# Altium PCB test.PcbDoc
Units mm, origin at the board's own origin, x right, y up, seen from the top; angles counter-clockwise.
Board outline 200 x 120 mm, 2 copper layers (Top Layer, Bottom Layer); 262 components, 180 nets, 2327 pads, 4 vias.
Unrouted connection lines stored in the file: 415.
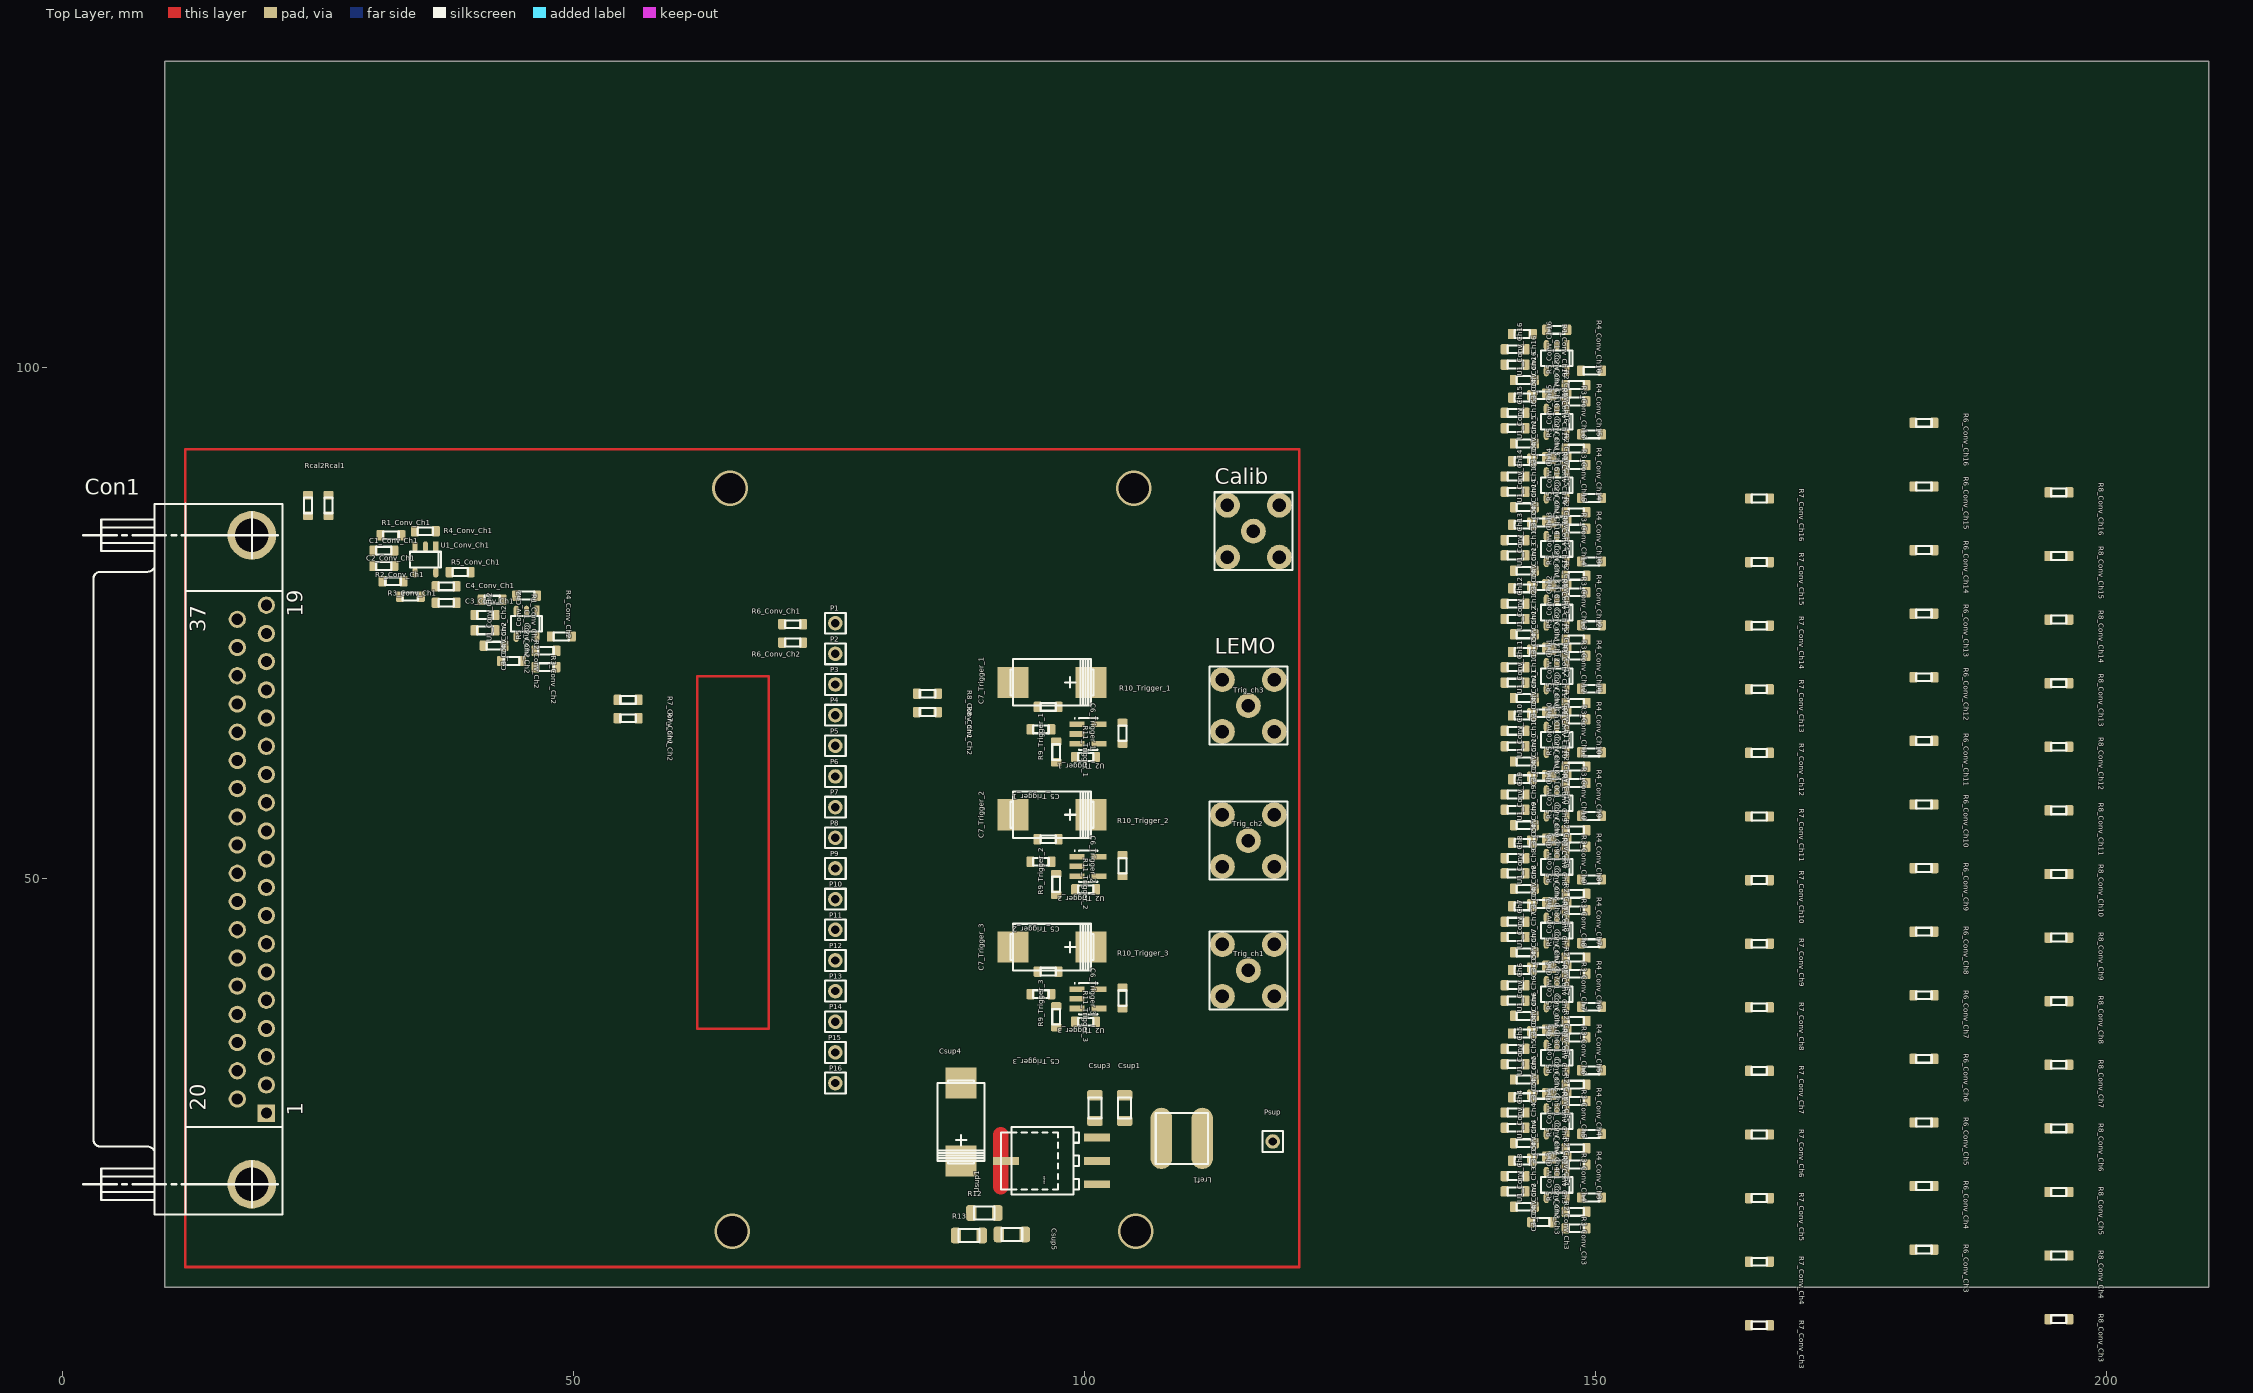
[diagram p0: Top Layer view]
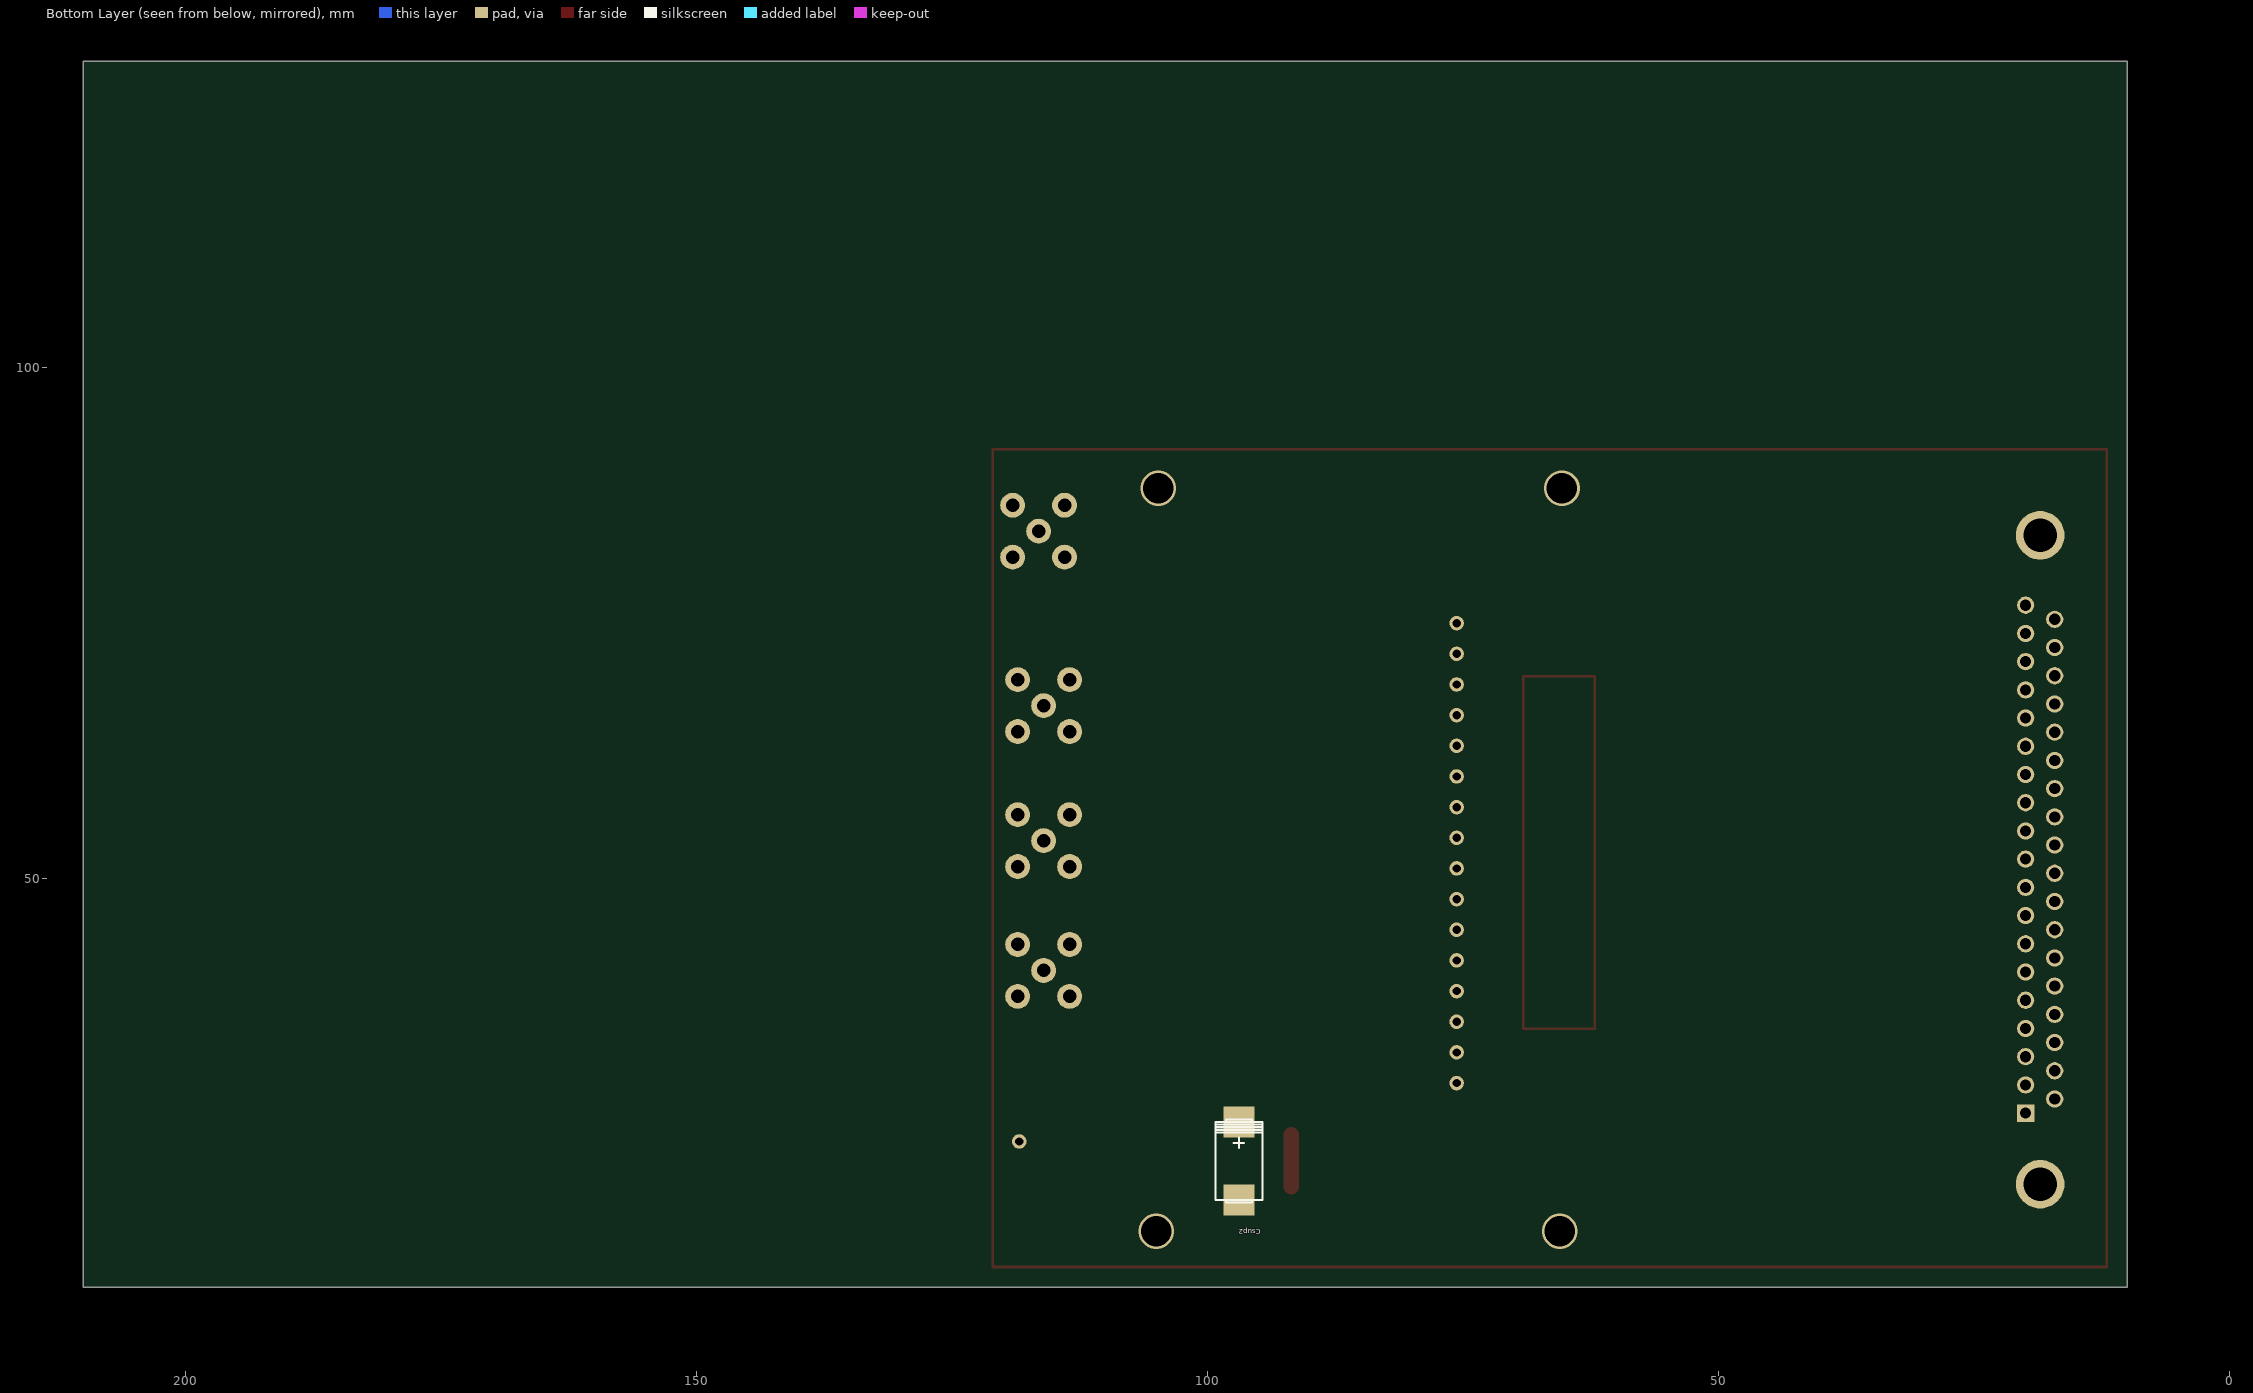
[diagram p1: Bottom Layer view, seen from below]

## Layer stack, top to bottom
Top Layer: signal copper 0.0356
Dielectric: dielectric 0.32, FR-4, Dk 4.8
Bottom Layer: signal copper 0.0356

## Board outline
10,10 10,130 210,130 210,10

## Design rules (kind name [scope] priority, off if disabled: settings)
Clearance [All] p1: gap=0.254
PolygonConnect [All] p1: connectstyle=Relief reliefconductorwidth=0.254 reliefentries=4 polygonreliefangle="90 Angle"
RoomDefinition Trigger_3 [InComponentClass('Trigger_3')] p1: confinementstyle=ConfineIn formatcopy=TRUE lockcomponents=FALSE outline 104.457,47.946 89,47.946 89,33.722 104.457,33.722
RoomDefinition Trigger_2 [InComponentClass('Trigger_2')] p2: confinementstyle=ConfineIn formatcopy=TRUE lockcomponents=FALSE outline 104.457,60.9 89,60.9 89,46.676 104.457,46.676
RoomDefinition Trigger_1 [InComponentClass('Trigger_1')] p3: confinementstyle=ConfineIn formatcopy=FALSE lockcomponents=FALSE outline 104.457,73.854 89,73.854 89,59.63 104.457,59.63
RoomDefinition Ref_Supply [InComponentClass('Ref_Supply')] p4: confinementstyle=ConfineIn formatcopy=TRUE lockcomponents=FALSE outline 84.5,12.986 119.8,12.986 119.8,33.372 84.5,33.372
RoomDefinition In-Out [InComponentClass('In-Out')] p5: confinementstyle=ConfineIn formatcopy=TRUE lockcomponents=FALSE outline 211,10 241,10 241,31 211,31
RoomDefinition Conv_Ch16 [InComponentClass('Conv_Ch16')] p6: confinementstyle=ConfineIn formatcopy=TRUE lockcomponents=FALSE outline 140.2,95.699 151.2,95.699 151.2,104.699 140.2,104.699
RoomDefinition Conv_Ch15 [InComponentClass('Conv_Ch15')] p7: confinementstyle=ConfineIn formatcopy=TRUE lockcomponents=FALSE outline 140.2,89.476 151.2,89.476 151.2,98.476 140.2,98.476
RoomDefinition Conv_Ch14 [InComponentClass('Conv_Ch14')] p8: confinementstyle=ConfineIn formatcopy=TRUE lockcomponents=FALSE outline 140.2,83.253 151.2,83.253 151.2,92.253 140.2,92.253
RoomDefinition Conv_Ch13 [InComponentClass('Conv_Ch13')] p9: confinementstyle=ConfineIn formatcopy=TRUE lockcomponents=FALSE outline 140.2,77.03 151.2,77.03 151.2,86.03 140.2,86.03
RoomDefinition Conv_Ch12 [InComponentClass('Conv_Ch12')] p10: confinementstyle=ConfineIn formatcopy=TRUE lockcomponents=FALSE outline 140.2,70.807 151.2,70.807 151.2,79.807 140.2,79.807
RoomDefinition Conv_Ch11 [InComponentClass('Conv_Ch11')] p11: confinementstyle=ConfineIn formatcopy=TRUE lockcomponents=FALSE outline 140.2,64.584 151.2,64.584 151.2,73.584 140.2,73.584
RoomDefinition Conv_Ch10 [InComponentClass('Conv_Ch10')] p12: confinementstyle=ConfineIn formatcopy=TRUE lockcomponents=FALSE outline 140.2,58.361 151.2,58.361 151.2,67.361 140.2,67.361
RoomDefinition Conv_Ch9 [InComponentClass('Conv_Ch9')] p13: confinementstyle=ConfineIn formatcopy=TRUE lockcomponents=FALSE outline 140.2,52.138 151.2,52.138 151.2,61.138 140.2,61.138
RoomDefinition Conv_Ch8 [InComponentClass('Conv_Ch8')] p14: confinementstyle=ConfineIn formatcopy=TRUE lockcomponents=FALSE outline 140.2,45.915 151.2,45.915 151.2,54.915 140.2,54.915
RoomDefinition Conv_Ch7 [InComponentClass('Conv_Ch7')] p15: confinementstyle=ConfineIn formatcopy=TRUE lockcomponents=FALSE outline 140.2,39.692 151.2,39.692 151.2,48.692 140.2,48.692
RoomDefinition Conv_Ch6 [InComponentClass('Conv_Ch6')] p16: confinementstyle=ConfineIn formatcopy=TRUE lockcomponents=FALSE outline 140.2,33.469 151.2,33.469 151.2,42.469 140.2,42.469
RoomDefinition Conv_Ch5 [InComponentClass('Conv_Ch5')] p17: confinementstyle=ConfineIn formatcopy=TRUE lockcomponents=FALSE outline 140.2,27.246 151.2,27.246 151.2,36.246 140.2,36.246
RoomDefinition Conv_Ch4 [InComponentClass('Conv_Ch4')] p18: confinementstyle=ConfineIn formatcopy=TRUE lockcomponents=FALSE outline 140.2,21.023 151.2,21.023 151.2,30.023 140.2,30.023
RoomDefinition Conv_Ch3 [InComponentClass('Conv_Ch3')] p19: confinementstyle=ConfineIn formatcopy=TRUE lockcomponents=FALSE outline 140.2,14.8 151.2,14.8 151.2,23.8 140.2,23.8
RoomDefinition Conv_Ch2 [InComponentClass('Conv_Ch2')] p20: confinementstyle=ConfineIn formatcopy=TRUE lockcomponents=FALSE outline 39.4,69.7 50.4,69.7 50.4,78.7 39.4,78.7
RoomDefinition Conv_Ch1 [InComponentClass('Conv_Ch1')] p21: confinementstyle=ConfineIn formatcopy=FALSE lockcomponents=FALSE outline 29.5,76 40.5,76 40.5,85 29.5,85
RoutingVias [All] p1: holewidth=0.711 width=1.27 viastyle="Through Hole" minholewidth=0.711 minwidth=1.27 maxholewidth=0.711 maxwidth=1.27
SilkscreenOverComponentPads [All] p1: minsilkscreentomaskgap=0.254
SolderMaskExpansion [All] p1: expansion=0.102
Width [All] p1: maxlimit=0.254 minlimit=0.254 preferedwidth=0.254
27 further rules are at their usual default settings.

## Classes and differential pairs
channel class Trigger: Trigger_1 Trigger_2 Trigger_3
channel class Converter: Conv_Ch1 Conv_Ch2 Conv_Ch3 Conv_Ch4 Conv_Ch5 Conv_Ch6 Conv_Ch7 Conv_Ch8 Conv_Ch9 Conv_Ch10 Conv_Ch11 Conv_Ch12 Conv_Ch13 Conv_Ch14 Conv_Ch15 Conv_Ch16
component class Trigger_3: C5_Trigger_3 C6_Trigger_3 C7_Trigger_3 R9_Trigger_3 R10_Trigger_3 R11_Trigger_3 U2_Trigger_3
component class Trigger_2: C5_Trigger_2 C6_Trigger_2 C7_Trigger_2 R9_Trigger_2 R10_Trigger_2 R11_Trigger_2 U2_Trigger_2
component class Trigger_1: C5_Trigger_1 C6_Trigger_1 C7_Trigger_1 R9_Trigger_1 R10_Trigger_1 R11_Trigger_1 U2_Trigger_1
component class Ref_Supply: Csup1 Csup2 Csup3 Csup4 Csup5 Lref1 Psup R12 R13 Usup1
component class In-Out: Calib Con1 Con3 P1 P2 P3 P4 P5 P6 P7 P8 P9 P10 P11 P12 P13 P14 P15 P16 Rcal1 Rcal2 Trig_ch1 Trig_ch2 Trig_ch3
component class Conv_Ch16: C1_Conv_Ch16 C2_Conv_Ch16 C3_Conv_Ch16 C4_Conv_Ch16 R1_Conv_Ch16 R2_Conv_Ch16 R3_Conv_Ch16 R4_Conv_Ch16 R5_Conv_Ch16 R6_Conv_Ch16 R7_Conv_Ch16 R8_Conv_Ch16 U1_Conv_Ch16
component class Conv_Ch15: C1_Conv_Ch15 C2_Conv_Ch15 C3_Conv_Ch15 C4_Conv_Ch15 R1_Conv_Ch15 R2_Conv_Ch15 R3_Conv_Ch15 R4_Conv_Ch15 R5_Conv_Ch15 R6_Conv_Ch15 R7_Conv_Ch15 R8_Conv_Ch15 U1_Conv_Ch15
component class Conv_Ch14: C1_Conv_Ch14 C2_Conv_Ch14 C3_Conv_Ch14 C4_Conv_Ch14 R1_Conv_Ch14 R2_Conv_Ch14 R3_Conv_Ch14 R4_Conv_Ch14 R5_Conv_Ch14 R6_Conv_Ch14 R7_Conv_Ch14 R8_Conv_Ch14 U1_Conv_Ch14
component class Conv_Ch13: C1_Conv_Ch13 C2_Conv_Ch13 C3_Conv_Ch13 C4_Conv_Ch13 R1_Conv_Ch13 R2_Conv_Ch13 R3_Conv_Ch13 R4_Conv_Ch13 R5_Conv_Ch13 R6_Conv_Ch13 R7_Conv_Ch13 R8_Conv_Ch13 U1_Conv_Ch13
component class Conv_Ch12: C1_Conv_Ch12 C2_Conv_Ch12 C3_Conv_Ch12 C4_Conv_Ch12 R1_Conv_Ch12 R2_Conv_Ch12 R3_Conv_Ch12 R4_Conv_Ch12 R5_Conv_Ch12 R6_Conv_Ch12 R7_Conv_Ch12 R8_Conv_Ch12 U1_Conv_Ch12
component class Conv_Ch11: C1_Conv_Ch11 C2_Conv_Ch11 C3_Conv_Ch11 C4_Conv_Ch11 R1_Conv_Ch11 R2_Conv_Ch11 R3_Conv_Ch11 R4_Conv_Ch11 R5_Conv_Ch11 R6_Conv_Ch11 R7_Conv_Ch11 R8_Conv_Ch11 U1_Conv_Ch11
component class Conv_Ch10: C1_Conv_Ch10 C2_Conv_Ch10 C3_Conv_Ch10 C4_Conv_Ch10 R1_Conv_Ch10 R2_Conv_Ch10 R3_Conv_Ch10 R4_Conv_Ch10 R5_Conv_Ch10 R6_Conv_Ch10 R7_Conv_Ch10 R8_Conv_Ch10 U1_Conv_Ch10
component class Conv_Ch9: C1_Conv_Ch9 C2_Conv_Ch9 C3_Conv_Ch9 C4_Conv_Ch9 R1_Conv_Ch9 R2_Conv_Ch9 R3_Conv_Ch9 R4_Conv_Ch9 R5_Conv_Ch9 R6_Conv_Ch9 R7_Conv_Ch9 R8_Conv_Ch9 U1_Conv_Ch9
component class Conv_Ch8: C1_Conv_Ch8 C2_Conv_Ch8 C3_Conv_Ch8 C4_Conv_Ch8 R1_Conv_Ch8 R2_Conv_Ch8 R3_Conv_Ch8 R4_Conv_Ch8 R5_Conv_Ch8 R6_Conv_Ch8 R7_Conv_Ch8 R8_Conv_Ch8 U1_Conv_Ch8
component class Conv_Ch7: C1_Conv_Ch7 C2_Conv_Ch7 C3_Conv_Ch7 C4_Conv_Ch7 R1_Conv_Ch7 R2_Conv_Ch7 R3_Conv_Ch7 R4_Conv_Ch7 R5_Conv_Ch7 R6_Conv_Ch7 R7_Conv_Ch7 R8_Conv_Ch7 U1_Conv_Ch7
component class Conv_Ch6: C1_Conv_Ch6 C2_Conv_Ch6 C3_Conv_Ch6 C4_Conv_Ch6 R1_Conv_Ch6 R2_Conv_Ch6 R3_Conv_Ch6 R4_Conv_Ch6 R5_Conv_Ch6 R6_Conv_Ch6 R7_Conv_Ch6 R8_Conv_Ch6 U1_Conv_Ch6
component class Conv_Ch5: C1_Conv_Ch5 C2_Conv_Ch5 C3_Conv_Ch5 C4_Conv_Ch5 R1_Conv_Ch5 R2_Conv_Ch5 R3_Conv_Ch5 R4_Conv_Ch5 R5_Conv_Ch5 R6_Conv_Ch5 R7_Conv_Ch5 R8_Conv_Ch5 U1_Conv_Ch5
component class Conv_Ch4: C1_Conv_Ch4 C2_Conv_Ch4 C3_Conv_Ch4 C4_Conv_Ch4 R1_Conv_Ch4 R2_Conv_Ch4 R3_Conv_Ch4 R4_Conv_Ch4 R5_Conv_Ch4 R6_Conv_Ch4 R7_Conv_Ch4 R8_Conv_Ch4 U1_Conv_Ch4
component class Conv_Ch3: C1_Conv_Ch3 C2_Conv_Ch3 C3_Conv_Ch3 C4_Conv_Ch3 R1_Conv_Ch3 R2_Conv_Ch3 R3_Conv_Ch3 R4_Conv_Ch3 R5_Conv_Ch3 R6_Conv_Ch3 R7_Conv_Ch3 R8_Conv_Ch3 U1_Conv_Ch3
component class Conv_Ch2: C1_Conv_Ch2 C2_Conv_Ch2 C3_Conv_Ch2 C4_Conv_Ch2 R1_Conv_Ch2 R2_Conv_Ch2 R3_Conv_Ch2 R4_Conv_Ch2 R5_Conv_Ch2 R6_Conv_Ch2 R7_Conv_Ch2 R8_Conv_Ch2 U1_Conv_Ch2
component class Conv_Ch1: C1_Conv_Ch1 C2_Conv_Ch1 C3_Conv_Ch1 C4_Conv_Ch1 R1_Conv_Ch1 R2_Conv_Ch1 R3_Conv_Ch1 R4_Conv_Ch1 R5_Conv_Ch1 R6_Conv_Ch1 R7_Conv_Ch1 R8_Conv_Ch1 U1_Conv_Ch1

## Components (designator, comment, footprint, x,y, rotation, side; value= is the part's Value field where it differs from the comment)
C1_Conv_Ch1 "2.2uF" chip0603 30.4,82.1 r0 top (schematic designator C1)
C1_Conv_Ch2 "2.2uF" chip0603 40.3,75.8 r0 top (schematic designator C1)
C1_Conv_Ch3 "2.2uF" chip0603 141.1,20.9 r0 top (schematic designator C1)
C1_Conv_Ch4 "2.2uF" chip0603 141.1,27.123 r0 top (schematic designator C1)
C1_Conv_Ch5 "2.2uF" chip0603 141.1,33.346 r0 top (schematic designator C1)
C1_Conv_Ch6 "2.2uF" chip0603 141.1,39.569 r0 top (schematic designator C1)
C1_Conv_Ch7 "2.2uF" chip0603 141.1,45.792 r0 top (schematic designator C1)
C1_Conv_Ch8 "2.2uF" chip0603 141.1,52.015 r0 top (schematic designator C1)
C1_Conv_Ch9 "2.2uF" chip0603 141.1,58.238 r0 top (schematic designator C1)
C1_Conv_Ch10 "2.2uF" chip0603 141.1,64.461 r0 top (schematic designator C1)
C1_Conv_Ch11 "2.2uF" chip0603 141.1,70.684 r0 top (schematic designator C1)
C1_Conv_Ch12 "2.2uF" chip0603 141.1,76.907 r0 top (schematic designator C1)
C1_Conv_Ch13 "2.2uF" chip0603 141.1,83.13 r0 top (schematic designator C1)
C1_Conv_Ch14 "2.2uF" chip0603 141.1,89.353 r0 top (schematic designator C1)
C1_Conv_Ch15 "2.2uF" chip0603 141.1,95.576 r0 top (schematic designator C1)
C1_Conv_Ch16 "2.2uF" chip0603 141.1,101.799 r0 top (schematic designator C1)
C2_Conv_Ch1 "2.2uF" chip0603 30.4,80.6 r0 top (schematic designator C2)
C2_Conv_Ch2 "2.2uF" chip0603 40.3,74.3 r0 top (schematic designator C2)
C2_Conv_Ch3 "2.2uF" chip0603 141.1,19.4 r0 top (schematic designator C2)
C2_Conv_Ch4 "2.2uF" chip0603 141.1,25.623 r0 top (schematic designator C2)
C2_Conv_Ch5 "2.2uF" chip0603 141.1,31.846 r0 top (schematic designator C2)
C2_Conv_Ch6 "2.2uF" chip0603 141.1,38.069 r0 top (schematic designator C2)
C2_Conv_Ch7 "2.2uF" chip0603 141.1,44.292 r0 top (schematic designator C2)
C2_Conv_Ch8 "2.2uF" chip0603 141.1,50.515 r0 top (schematic designator C2)
C2_Conv_Ch9 "2.2uF" chip0603 141.1,56.738 r0 top (schematic designator C2)
C2_Conv_Ch10 "2.2uF" chip0603 141.1,62.961 r0 top (schematic designator C2)
C2_Conv_Ch11 "2.2uF" chip0603 141.1,69.184 r0 top (schematic designator C2)
C2_Conv_Ch12 "2.2uF" chip0603 141.1,75.407 r0 top (schematic designator C2)
C2_Conv_Ch13 "2.2uF" chip0603 141.1,81.63 r0 top (schematic designator C2)
C2_Conv_Ch14 "2.2uF" chip0603 141.1,87.853 r0 top (schematic designator C2)
C2_Conv_Ch15 "2.2uF" chip0603 141.1,94.076 r0 top (schematic designator C2)
C2_Conv_Ch16 "2.2uF" chip0603 141.1,100.299 r0 top (schematic designator C2)
C3_Conv_Ch1 "0.1uF" chip0603 38.532,77 r180 top (schematic designator C3)
C3_Conv_Ch2 "0.1uF" chip0603 48.3,70.7 r180 top (schematic designator C3)
C3_Conv_Ch3 "0.1uF" chip0603 149.1,15.8 r180 top (schematic designator C3)
C3_Conv_Ch4 "0.1uF" chip0603 149.1,22.023 r180 top (schematic designator C3)
C3_Conv_Ch5 "0.1uF" chip0603 149.1,28.246 r180 top (schematic designator C3)
C3_Conv_Ch6 "0.1uF" chip0603 149.1,34.469 r180 top (schematic designator C3)
C3_Conv_Ch7 "0.1uF" chip0603 149.1,40.692 r180 top (schematic designator C3)
C3_Conv_Ch8 "0.1uF" chip0603 149.1,46.915 r180 top (schematic designator C3)
C3_Conv_Ch9 "0.1uF" chip0603 149.1,53.138 r180 top (schematic designator C3)
C3_Conv_Ch10 "0.1uF" chip0603 149.1,59.361 r180 top (schematic designator C3)
C3_Conv_Ch11 "0.1uF" chip0603 149.1,65.584 r180 top (schematic designator C3)
C3_Conv_Ch12 "0.1uF" chip0603 149.1,71.807 r180 top (schematic designator C3)
C3_Conv_Ch13 "0.1uF" chip0603 149.1,78.03 r180 top (schematic designator C3)
C3_Conv_Ch14 "0.1uF" chip0603 149.1,84.253 r180 top (schematic designator C3)
C3_Conv_Ch15 "0.1uF" chip0603 149.1,90.476 r180 top (schematic designator C3)
C3_Conv_Ch16 "0.1uF" chip0603 149.1,96.699 r180 top (schematic designator C3)
C4_Conv_Ch1 "0.1uF" chip0603 38.532,78.6 r180 top (schematic designator C4)
C4_Conv_Ch2 "0.1uF" chip0603 48.3,72.3 r180 top (schematic designator C4)
C4_Conv_Ch3 "0.1uF" chip0603 149.1,17.4 r180 top (schematic designator C4)
C4_Conv_Ch4 "0.1uF" chip0603 149.1,23.623 r180 top (schematic designator C4)
C4_Conv_Ch5 "0.1uF" chip0603 149.1,29.846 r180 top (schematic designator C4)
C4_Conv_Ch6 "0.1uF" chip0603 149.1,36.069 r180 top (schematic designator C4)
C4_Conv_Ch7 "0.1uF" chip0603 149.1,42.292 r180 top (schematic designator C4)
C4_Conv_Ch8 "0.1uF" chip0603 149.1,48.515 r180 top (schematic designator C4)
C4_Conv_Ch9 "0.1uF" chip0603 149.1,54.738 r180 top (schematic designator C4)
C4_Conv_Ch10 "0.1uF" chip0603 149.1,60.961 r180 top (schematic designator C4)
C4_Conv_Ch11 "0.1uF" chip0603 149.1,67.184 r180 top (schematic designator C4)
C4_Conv_Ch12 "0.1uF" chip0603 149.1,73.407 r180 top (schematic designator C4)
C4_Conv_Ch13 "0.1uF" chip0603 149.1,79.63 r180 top (schematic designator C4)
C4_Conv_Ch14 "0.1uF" chip0603 149.1,85.853 r180 top (schematic designator C4)
C4_Conv_Ch15 "0.1uF" chip0603 149.1,92.076 r180 top (schematic designator C4)
C4_Conv_Ch16 "0.1uF" chip0603 149.1,98.299 r180 top (schematic designator C4)
C5_Trigger_1 "0.1uF" chip0603 97.2,63.41 r270 top (schematic designator C5)
C5_Trigger_2 "0.1uF" chip0603 97.2,50.456 r270 top (schematic designator C5)
C5_Trigger_3 "0.1uF" chip0603 97.2,37.502 r270 top (schematic designator C5)
C6_Trigger_1 "0.1uF" chip0603 95.4,66.81 r0 top (schematic designator C6)
C6_Trigger_2 "0.1uF" chip0603 95.4,53.856 r0 top (schematic designator C6)
C6_Trigger_3 "0.1uF" chip0603 95.4,40.902 r0 top (schematic designator C6)
C7_Trigger_1 "100uF" CEL-SMD300 100.6,69.21 r180 top (schematic designator C7)
C7_Trigger_2 "100uF" CEL-SMD300 100.6,56.256 r180 top (schematic designator C7)
C7_Trigger_3 "100uF" CEL-SMD300 100.6,43.302 r180 top (schematic designator C7)
Calib "LEMO" LEMO 116.5,84 r0 top
Con1 "DBR-37F" DBR-F-37 18.5,20.1 r90 top
Csup1 "0.47uF" chip0805 103.9,26.286 r90 top
Csup2 "100uF" CEL-SMD300 96.9,26.186 r270 bottom
Csup3 "0.47uF" chip0805 101,26.286 r90 top
Csup4 "100uF" CEL-SMD300 87.9,22.386 r90 top
Csup5 "0.47uF" chip0805 91.6,15.186 r0 top
Lref1 "100mkH" SDR0604 109.5,24.586 r180 top
P1 "KLEMME" Pad12 75.6,75 r90 top
P2 "KLEMME" Pad12 75.6,72 r90 top
P3 "KLEMME" Pad12 75.6,69 r90 top
P4 "KLEMME" Pad12 75.6,66 r90 top
P5 "KLEMME" Pad12 75.6,63 r90 top
P6 "KLEMME" Pad12 75.6,60 r90 top
P7 "KLEMME" Pad12 75.6,57 r90 top
P8 "KLEMME" Pad12 75.6,54 r90 top
P9 "KLEMME" Pad12 75.6,51 r90 top
P10 "KLEMME" Pad12 75.6,48 r90 top
P11 "KLEMME" Pad12 75.6,45 r90 top
P12 "KLEMME" Pad12 75.6,42 r90 top
P13 "KLEMME" Pad12 75.6,39 r90 top
P14 "KLEMME" Pad12 75.6,36 r90 top
P15 "KLEMME" Pad12 75.6,33 r90 top
P16 "KLEMME" Pad12 75.6,30 r90 top
Psup "KLEMME" Pad12 118.4,24.286 r90 top
R1_Conv_Ch1 "510" chip0603 31.1,83.6 r0 top (schematic designator R1)
R1_Conv_Ch2 "510" chip0603 41,77.3 r0 top (schematic designator R1)
R1_Conv_Ch3 "510" chip0603 141.8,22.4 r0 top (schematic designator R1)
R1_Conv_Ch4 "510" chip0603 141.8,28.623 r0 top (schematic designator R1)
R1_Conv_Ch5 "510" chip0603 141.8,34.846 r0 top (schematic designator R1)
R1_Conv_Ch6 "510" chip0603 141.8,41.069 r0 top (schematic designator R1)
R1_Conv_Ch7 "510" chip0603 141.8,47.292 r0 top (schematic designator R1)
R1_Conv_Ch8 "510" chip0603 141.8,53.515 r0 top (schematic designator R1)
R1_Conv_Ch9 "510" chip0603 141.8,59.738 r0 top (schematic designator R1)
R1_Conv_Ch10 "510" chip0603 141.8,65.961 r0 top (schematic designator R1)
R1_Conv_Ch11 "510" chip0603 141.8,72.184 r0 top (schematic designator R1)
R1_Conv_Ch12 "510" chip0603 141.8,78.407 r0 top (schematic designator R1)
R1_Conv_Ch13 "510" chip0603 141.8,84.63 r0 top (schematic designator R1)
R1_Conv_Ch14 "510" chip0603 141.8,90.853 r0 top (schematic designator R1)
R1_Conv_Ch15 "510" chip0603 141.8,97.076 r0 top (schematic designator R1)
R1_Conv_Ch16 "510" chip0603 141.8,103.299 r0 top (schematic designator R1)
R2_Conv_Ch1 "510" chip0603 31.3,79.1 r0 top (schematic designator R2)
R2_Conv_Ch2 "510" chip0603 41.2,72.8 r0 top (schematic designator R2)
R2_Conv_Ch3 "510" chip0603 142,17.9 r0 top (schematic designator R2)
R2_Conv_Ch4 "510" chip0603 142,24.123 r0 top (schematic designator R2)
R2_Conv_Ch5 "510" chip0603 142,30.346 r0 top (schematic designator R2)
R2_Conv_Ch6 "510" chip0603 142,36.569 r0 top (schematic designator R2)
R2_Conv_Ch7 "510" chip0603 142,42.792 r0 top (schematic designator R2)
R2_Conv_Ch8 "510" chip0603 142,49.015 r0 top (schematic designator R2)
R2_Conv_Ch9 "510" chip0603 142,55.238 r0 top (schematic designator R2)
R2_Conv_Ch10 "510" chip0603 142,61.461 r0 top (schematic designator R2)
R2_Conv_Ch11 "510" chip0603 142,67.684 r0 top (schematic designator R2)
R2_Conv_Ch12 "510" chip0603 142,73.907 r0 top (schematic designator R2)
R2_Conv_Ch13 "510" chip0603 142,80.13 r0 top (schematic designator R2)
R2_Conv_Ch14 "510" chip0603 142,86.353 r0 top (schematic designator R2)
R2_Conv_Ch15 "510" chip0603 142,92.576 r0 top (schematic designator R2)
R2_Conv_Ch16 "510" chip0603 142,98.799 r0 top (schematic designator R2)
R3_Conv_Ch1 "510" chip0603 33,77.6 r0 top (schematic designator R3)
R3_Conv_Ch2 "510" chip0603 42.9,71.3 r0 top (schematic designator R3)
R3_Conv_Ch3 "510" chip0603 143.7,16.4 r0 top (schematic designator R3)
R3_Conv_Ch4 "510" chip0603 143.7,22.623 r0 top (schematic designator R3)
R3_Conv_Ch5 "510" chip0603 143.7,28.846 r0 top (schematic designator R3)
R3_Conv_Ch6 "510" chip0603 143.7,35.069 r0 top (schematic designator R3)
R3_Conv_Ch7 "510" chip0603 143.7,41.292 r0 top (schematic designator R3)
R3_Conv_Ch8 "510" chip0603 143.7,47.515 r0 top (schematic designator R3)
R3_Conv_Ch9 "510" chip0603 143.7,53.738 r0 top (schematic designator R3)
R3_Conv_Ch10 "510" chip0603 143.7,59.961 r0 top (schematic designator R3)
R3_Conv_Ch11 "510" chip0603 143.7,66.184 r0 top (schematic designator R3)
R3_Conv_Ch12 "510" chip0603 143.7,72.407 r0 top (schematic designator R3)
R3_Conv_Ch13 "510" chip0603 143.7,78.63 r0 top (schematic designator R3)
R3_Conv_Ch14 "510" chip0603 143.7,84.853 r0 top (schematic designator R3)
R3_Conv_Ch15 "510" chip0603 143.7,91.076 r0 top (schematic designator R3)
R3_Conv_Ch16 "510" chip0603 143.7,97.299 r0 top (schematic designator R3)
R4_Conv_Ch1 "510" chip0603 34.468,84 r0 top (schematic designator R4)
R4_Conv_Ch2 "510" chip0603 44.368,77.7 r0 top (schematic designator R4)
R4_Conv_Ch3 "510" chip0603 145.168,22.8 r0 top (schematic designator R4)
R4_Conv_Ch4 "510" chip0603 145.168,29.023 r0 top (schematic designator R4)
R4_Conv_Ch5 "510" chip0603 145.168,35.246 r0 top (schematic designator R4)
R4_Conv_Ch6 "510" chip0603 145.168,41.469 r0 top (schematic designator R4)
R4_Conv_Ch7 "510" chip0603 145.168,47.692 r0 top (schematic designator R4)
R4_Conv_Ch8 "510" chip0603 145.168,53.915 r0 top (schematic designator R4)
R4_Conv_Ch9 "510" chip0603 145.168,60.138 r0 top (schematic designator R4)
R4_Conv_Ch10 "510" chip0603 145.168,66.361 r0 top (schematic designator R4)
R4_Conv_Ch11 "510" chip0603 145.168,72.584 r0 top (schematic designator R4)
R4_Conv_Ch12 "510" chip0603 145.168,78.807 r0 top (schematic designator R4)
R4_Conv_Ch13 "510" chip0603 145.168,85.03 r0 top (schematic designator R4)
R4_Conv_Ch14 "510" chip0603 145.168,91.253 r0 top (schematic designator R4)
R4_Conv_Ch15 "510" chip0603 145.168,97.476 r0 top (schematic designator R4)
R4_Conv_Ch16 "510" chip0603 145.168,103.699 r0 top (schematic designator R4)
R5_Conv_Ch1 "20" chip0603 39.9,80 r180 top (schematic designator R5)
R5_Conv_Ch2 "20" chip0603 49.8,73.7 r180 top (schematic designator R5)
R5_Conv_Ch3 "20" chip0603 150.6,18.8 r180 top (schematic designator R5)
R5_Conv_Ch4 "20" chip0603 150.6,25.023 r180 top (schematic designator R5)
R5_Conv_Ch5 "20" chip0603 150.6,31.246 r180 top (schematic designator R5)
R5_Conv_Ch6 "20" chip0603 150.6,37.469 r180 top (schematic designator R5)
R5_Conv_Ch7 "20" chip0603 150.6,43.692 r180 top (schematic designator R5)
R5_Conv_Ch8 "20" chip0603 150.6,49.915 r180 top (schematic designator R5)
R5_Conv_Ch9 "20" chip0603 150.6,56.138 r180 top (schematic designator R5)
R5_Conv_Ch10 "20" chip0603 150.6,62.361 r180 top (schematic designator R5)
R5_Conv_Ch11 "20" chip0603 150.6,68.584 r180 top (schematic designator R5)
R5_Conv_Ch12 "20" chip0603 150.6,74.807 r180 top (schematic designator R5)
R5_Conv_Ch13 "20" chip0603 150.6,81.03 r180 top (schematic designator R5)
R5_Conv_Ch14 "20" chip0603 150.6,87.253 r180 top (schematic designator R5)
R5_Conv_Ch15 "20" chip0603 150.6,93.476 r180 top (schematic designator R5)
R5_Conv_Ch16 "20" chip0603 150.6,99.699 r180 top (schematic designator R5)
R6_Conv_Ch1 "240" chip0603 70.4,74.9 r0 top (schematic designator R6)
R6_Conv_Ch2 "240" chip0603 70.4,73.1 r0 top (schematic designator R6)
R6_Conv_Ch3 "240" chip0603 181.1,13.7 r0 top (schematic designator R6)
R6_Conv_Ch4 "240" chip0603 181.1,19.923 r0 top (schematic designator R6)
R6_Conv_Ch5 "240" chip0603 181.1,26.146 r0 top (schematic designator R6)
R6_Conv_Ch6 "240" chip0603 181.1,32.369 r0 top (schematic designator R6)
R6_Conv_Ch7 "240" chip0603 181.1,38.592 r0 top (schematic designator R6)
R6_Conv_Ch8 "240" chip0603 181.1,44.815 r0 top (schematic designator R6)
R6_Conv_Ch9 "240" chip0603 181.1,51.038 r0 top (schematic designator R6)
R6_Conv_Ch10 "240" chip0603 181.1,57.261 r0 top (schematic designator R6)
R6_Conv_Ch11 "240" chip0603 181.1,63.484 r0 top (schematic designator R6)
R6_Conv_Ch12 "240" chip0603 181.1,69.707 r0 top (schematic designator R6)
R6_Conv_Ch13 "240" chip0603 181.1,75.93 r0 top (schematic designator R6)
R6_Conv_Ch14 "240" chip0603 181.1,82.153 r0 top (schematic designator R6)
R6_Conv_Ch15 "240" chip0603 181.1,88.376 r0 top (schematic designator R6)
R6_Conv_Ch16 "240" chip0603 181.1,94.599 r0 top (schematic designator R6)
R7_Conv_Ch1 "24" chip0603 54.3,67.5 r0 top (schematic designator R7)
R7_Conv_Ch2 "24" chip0603 54.3,65.7 r0 top (schematic designator R7)
R7_Conv_Ch3 "24" chip0603 165,6.3 r0 top (schematic designator R7)
R7_Conv_Ch4 "24" chip0603 165,12.523 r0 top (schematic designator R7)
R7_Conv_Ch5 "24" chip0603 165,18.746 r0 top (schematic designator R7)
R7_Conv_Ch6 "24" chip0603 165,24.969 r0 top (schematic designator R7)
R7_Conv_Ch7 "24" chip0603 165,31.192 r0 top (schematic designator R7)
R7_Conv_Ch8 "24" chip0603 165,37.415 r0 top (schematic designator R7)
R7_Conv_Ch9 "24" chip0603 165,43.638 r0 top (schematic designator R7)
R7_Conv_Ch10 "24" chip0603 165,49.861 r0 top (schematic designator R7)
R7_Conv_Ch11 "24" chip0603 165,56.084 r0 top (schematic designator R7)
R7_Conv_Ch12 "24" chip0603 165,62.307 r0 top (schematic designator R7)
R7_Conv_Ch13 "24" chip0603 165,68.53 r0 top (schematic designator R7)
R7_Conv_Ch14 "24" chip0603 165,74.753 r0 top (schematic designator R7)
R7_Conv_Ch15 "24" chip0603 165,80.976 r0 top (schematic designator R7)
R7_Conv_Ch16 "24" chip0603 165,87.199 r0 top (schematic designator R7)
R8_Conv_Ch1 "200" chip0603 83.6,68.1 r0 top (schematic designator R8)
R8_Conv_Ch2 "200" chip0603 83.6,66.3 r0 top (schematic designator R8)
R8_Conv_Ch3 "200" chip0603 194.3,6.9 r0 top (schematic designator R8)
R8_Conv_Ch4 "200" chip0603 194.3,13.123 r0 top (schematic designator R8)
R8_Conv_Ch5 "200" chip0603 194.3,19.346 r0 top (schematic designator R8)
R8_Conv_Ch6 "200" chip0603 194.3,25.569 r0 top (schematic designator R8)
R8_Conv_Ch7 "200" chip0603 194.3,31.792 r0 top (schematic designator R8)
R8_Conv_Ch8 "200" chip0603 194.3,38.015 r0 top (schematic designator R8)
R8_Conv_Ch9 "200" chip0603 194.3,44.238 r0 top (schematic designator R8)
R8_Conv_Ch10 "200" chip0603 194.3,50.461 r0 top (schematic designator R8)
R8_Conv_Ch11 "200" chip0603 194.3,56.684 r0 top (schematic designator R8)
R8_Conv_Ch12 "200" chip0603 194.3,62.907 r0 top (schematic designator R8)
R8_Conv_Ch13 "200" chip0603 194.3,69.13 r0 top (schematic designator R8)
R8_Conv_Ch14 "200" chip0603 194.3,75.353 r0 top (schematic designator R8)
R8_Conv_Ch15 "200" chip0603 194.3,81.576 r0 top (schematic designator R8)
R8_Conv_Ch16 "200" chip0603 194.3,87.799 r0 top (schematic designator R8)
R9_Trigger_1 "200" chip0603 101.1,61.91 r180 top (schematic designator R9)
R9_Trigger_2 "200" chip0603 101.1,48.956 r180 top (schematic designator R9)
R9_Trigger_3 "200" chip0603 101.1,36.002 r180 top (schematic designator R9)
R10_Trigger_1 "620" chip0603 103.7,63.21 r90 top (schematic designator R10)
R10_Trigger_2 "620" chip0603 103.7,50.256 r90 top (schematic designator R10)
R10_Trigger_3 "620" chip0603 103.7,37.302 r90 top (schematic designator R10)
R11_Trigger_1 "20" chip0603 94.7,64.61 r0 top (schematic designator R11)
R11_Trigger_2 "20" chip0603 94.7,51.656 r0 top (schematic designator R11)
R11_Trigger_3 "20" chip0603 94.7,38.702 r0 top (schematic designator R11)
R12 "510" chip0805 88.9,17.286 r0 top
R13 "510" chip0805 87.4,15.086 r0 top
Rcal1 "51" chip0603 26,85.5 r90 top
Rcal2 "51" chip0603 24,85.5 r90 top
Trig_ch1 "LEMO" LEMO 116.01,41.023 r90 top
Trig_ch2 "LEMO" LEMO 116.01,53.723 r180 top
Trig_ch3 "LEMO" LEMO 116.01,66.931 r180 top
U1_Conv_Ch1 "ADA4891-1" SOT23-5 36.5,82.5 r180 top (schematic designator U1)
U1_Conv_Ch2 "ADA4891-1" SOT23-5 46.4,76.2 r180 top (schematic designator U1)
U1_Conv_Ch3 "ADA4891-1" SOT23-5 147.2,21.3 r180 top (schematic designator U1)
U1_Conv_Ch4 "ADA4891-1" SOT23-5 147.2,27.523 r180 top (schematic designator U1)
U1_Conv_Ch5 "ADA4891-1" SOT23-5 147.2,33.746 r180 top (schematic designator U1)
U1_Conv_Ch6 "ADA4891-1" SOT23-5 147.2,39.969 r180 top (schematic designator U1)
U1_Conv_Ch7 "ADA4891-1" SOT23-5 147.2,46.192 r180 top (schematic designator U1)
U1_Conv_Ch8 "ADA4891-1" SOT23-5 147.2,52.415 r180 top (schematic designator U1)
U1_Conv_Ch9 "ADA4891-1" SOT23-5 147.2,58.638 r180 top (schematic designator U1)
U1_Conv_Ch10 "ADA4891-1" SOT23-5 147.2,64.861 r180 top (schematic designator U1)
U1_Conv_Ch11 "ADA4891-1" SOT23-5 147.2,71.084 r180 top (schematic designator U1)
U1_Conv_Ch12 "ADA4891-1" SOT23-5 147.2,77.307 r180 top (schematic designator U1)
U1_Conv_Ch13 "ADA4891-1" SOT23-5 147.2,83.53 r180 top (schematic designator U1)
U1_Conv_Ch14 "ADA4891-1" SOT23-5 147.2,89.753 r180 top (schematic designator U1)
U1_Conv_Ch15 "ADA4891-1" SOT23-5 147.2,95.976 r180 top (schematic designator U1)
U1_Conv_Ch16 "ADA4891-1" SOT23-5 147.2,102.199 r180 top (schematic designator U1)
U2_Trigger_1 "AD8001ART" RT-5 100.325,64.156 r270 top (schematic designator U2)
U2_Trigger_2 "AD8001ART" RT-5 100.325,51.202 r270 top (schematic designator U2)
U2_Trigger_3 "AD8001ART" RT-5 100.325,38.248 r270 top (schematic designator U2)
Usup1 "NCP1117-1.25V" TO-252 101.2,22.386 r90 top

## Footprints (in the part's own frame and the unit in brackets; to place one, negate y for a bottom-side part, rotate by r counter-clockwise, add the part's x,y. Pads: shape width x height; smd on the part's side, far side on the other; paste and mask are expansions set on the pad)
CEL-SMD300 [mil]
  rect 120x120 smd: +(0,0) -(300,0)
  silkscreen extent -10,-90 310,90
chip0603 [mil]
  oval 12x40 smd: 1(-10,0) 1(0,0) 1(10,0) 2(70,0) 2(80,0) 2(90,0)
  oval 32x12 smd: 1(0,-14) 1(0,14) 2(80,-14) 2(80,14)
  silkscreen extent 10,-15 70,15
chip0805 [mil]
  oval 20x60 smd: 1(-10,0) 1(0,0) 1(10,0) 2(90,0) 2(100,0) 2(110,0)
  oval 40x20 smd: 1(0,20) 1(0,-20) 2(100,-20) 2(100,20)
  silkscreen extent 10,-25 90,25
DBR-F-37 [mm]
  rect 1.69x1.69 hole 1.09: 1(6.96,-1.42)
  round 1.69 hole 1.09: 2(9.721,-1.42) 3(12.482,-1.42) 4(15.243,-1.42) 5(18.004,-1.42) 6(20.765,-1.42) 7(23.526,-1.42) 8(26.287,-1.42) 9(29.048,-1.42) 10(31.809,-1.42) 11(34.57,-1.42) 12(37.331,-1.42) 13(40.092,-1.42) 14(42.853,-1.42) 15(45.614,-1.42) 16(48.375,-1.42) 17(51.136,-1.42) 18(53.897,-1.42) 19(56.658,-1.42) 20(8.34,1.42) 21(11.101,1.42) 22(13.862,1.42) 23(16.623,1.42) 24(19.384,1.42) 25(22.145,1.42) 26(24.906,1.42) 27(27.667,1.42) 28(30.428,1.42) 29(33.189,1.42) 30(35.95,1.42) 31(38.711,1.42) 32(41.473,1.42) 33(44.234,1.42) 34(46.995,1.42) 35(49.756,1.42) 36(52.517,1.42) 37(55.278,1.42)
  round 4.76 hole 3.26: 38(0,0) 39(63.5,0)
  silkscreen extent -2.97,-3 66.6,16.51
LEMO [mil]
  round 96 hole 52: SHIELD(-100,-100) SHIELD(-100,100) SHIELD(100,-100) SHIELD(100,100) WIRE(0,0)
  silkscreen extent -150,-150 150,150
Pad12 [mil]
  round 56 hole 32: PAD(0,0)
  silkscreen extent -40,-40 40,40
RT-5 [mm] "SOT-23/SC-74A; 5 Leads; Body 3.1 x 3 mm, inc. leads (LxW max)"
  rect 0.55x1.45 smd: 1(-0.95,-1.075) 2(0,-1.075) 3(0.95,-1.075) 4(0.95,1.075) 5(-0.95,1.075)
  silkscreen extent -1.57,-1.35 1.55,0.9
SDR0604 [mm]
  oval 2.1x6 smd: 1(-2,0) 2(2,0)
  silkscreen extent -2.55,-2.5 2.55,2.5
SOT23-5 [mil]
  rect 20x40 smd: 1(0,0)
  oval 20x40 smd: 2(40,0) 3(80,0) 4(80,100) 5(0,100)
  silkscreen extent -20,20 100,80
TO-252 [mil]
  rect 30x100 smd: 1(-90,0) 2(0,0) 3(90,0) 4(0,350)
  Top Layer lines w60: -100,370 100,370
  silkscreen extent -130,70 130,370

## Part data
C1_Conv_Ch1 C1_Conv_Ch2 C1_Conv_Ch3 C1_Conv_Ch4 C1_Conv_Ch5 C1_Conv_Ch6 C1_Conv_Ch7 C1_Conv_Ch8 C1_Conv_Ch9 C1_Conv_Ch10 C1_Conv_Ch11 C1_Conv_Ch12 C1_Conv_Ch13 C1_Conv_Ch14 C1_Conv_Ch15 C1_Conv_Ch16 C2_Conv_Ch1 C2_Conv_Ch2 C2_Conv_Ch3 C2_Conv_Ch4 C2_Conv_Ch5 C2_Conv_Ch6 C2_Conv_Ch7 C2_Conv_Ch8 C2_Conv_Ch9 C2_Conv_Ch10 C2_Conv_Ch11 C2_Conv_Ch12 C2_Conv_Ch13 C2_Conv_Ch14 C2_Conv_Ch15 C2_Conv_Ch16 C3_Conv_Ch1 C3_Conv_Ch2 C3_Conv_Ch3 C3_Conv_Ch4 C3_Conv_Ch5 C3_Conv_Ch6 C3_Conv_Ch7 C3_Conv_Ch8 C3_Conv_Ch9 C3_Conv_Ch10 C3_Conv_Ch11 C3_Conv_Ch12 C3_Conv_Ch13 C3_Conv_Ch14 C3_Conv_Ch15 C3_Conv_Ch16 C4_Conv_Ch1 C4_Conv_Ch2 C4_Conv_Ch3 C4_Conv_Ch4 C4_Conv_Ch5 C4_Conv_Ch6 C4_Conv_Ch7 C4_Conv_Ch8 C4_Conv_Ch9 C4_Conv_Ch10 C4_Conv_Ch11 C4_Conv_Ch12 C4_Conv_Ch13 C4_Conv_Ch14 C4_Conv_Ch15 C4_Conv_Ch16 C5_Trigger_1 C5_Trigger_2 C5_Trigger_3 C6_Trigger_1 C6_Trigger_2 C6_Trigger_3 Csup1 Csup3 Csup5: library part C
C7_Trigger_1 C7_Trigger_2 C7_Trigger_3 Csup2 Csup4: library part "C POL"
Calib Trig_ch1 Trig_ch2 Trig_ch3: library part COAX-F, "RF Coaxial PCB Connector, MCX; Thru-Hole, Right-Angle Mount Socket, Blunt Post Terminal, 50 Ohm Impedance"
Lref1: library part DR
R1_Conv_Ch1 R1_Conv_Ch2 R1_Conv_Ch3 R1_Conv_Ch4 R1_Conv_Ch5 R1_Conv_Ch6 R1_Conv_Ch7 R1_Conv_Ch8 R1_Conv_Ch9 R1_Conv_Ch10 R1_Conv_Ch11 R1_Conv_Ch12 R1_Conv_Ch13 R1_Conv_Ch14 R1_Conv_Ch15 R1_Conv_Ch16 R2_Conv_Ch1 R2_Conv_Ch2 R2_Conv_Ch3 R2_Conv_Ch4 R2_Conv_Ch5 R2_Conv_Ch6 R2_Conv_Ch7 R2_Conv_Ch8 R2_Conv_Ch9 R2_Conv_Ch10 R2_Conv_Ch11 R2_Conv_Ch12 R2_Conv_Ch13 R2_Conv_Ch14 R2_Conv_Ch15 R2_Conv_Ch16 R3_Conv_Ch1 R3_Conv_Ch2 R3_Conv_Ch3 R3_Conv_Ch4 R3_Conv_Ch5 R3_Conv_Ch6 R3_Conv_Ch7 R3_Conv_Ch8 R3_Conv_Ch9 R3_Conv_Ch10 R3_Conv_Ch11 R3_Conv_Ch12 R3_Conv_Ch13 R3_Conv_Ch14 R3_Conv_Ch15 R3_Conv_Ch16 R4_Conv_Ch1 R4_Conv_Ch2 R4_Conv_Ch3 R4_Conv_Ch4 R4_Conv_Ch5 R4_Conv_Ch6 R4_Conv_Ch7 R4_Conv_Ch8 R4_Conv_Ch9 R4_Conv_Ch10 R4_Conv_Ch11 R4_Conv_Ch12 R4_Conv_Ch13 R4_Conv_Ch14 R4_Conv_Ch15 R4_Conv_Ch16 R5_Conv_Ch1 R5_Conv_Ch2 R5_Conv_Ch3 R5_Conv_Ch4 R5_Conv_Ch5 R5_Conv_Ch6 R5_Conv_Ch7 R5_Conv_Ch8 R5_Conv_Ch9 R5_Conv_Ch10 R5_Conv_Ch11 R5_Conv_Ch12 R5_Conv_Ch13 R5_Conv_Ch14 R5_Conv_Ch15 R5_Conv_Ch16 R6_Conv_Ch1 R6_Conv_Ch2 R6_Conv_Ch3 R6_Conv_Ch4 R6_Conv_Ch5 R6_Conv_Ch6 R6_Conv_Ch7 R6_Conv_Ch8 R6_Conv_Ch9 R6_Conv_Ch10 R6_Conv_Ch11 R6_Conv_Ch12 R6_Conv_Ch13 R6_Conv_Ch14 R6_Conv_Ch15 R6_Conv_Ch16 R7_Conv_Ch1 R7_Conv_Ch2 R7_Conv_Ch3 R7_Conv_Ch4 R7_Conv_Ch5 R7_Conv_Ch6 R7_Conv_Ch7 R7_Conv_Ch8 R7_Conv_Ch9 R7_Conv_Ch10 R7_Conv_Ch11 R7_Conv_Ch12 R7_Conv_Ch13 R7_Conv_Ch14 R7_Conv_Ch15 R7_Conv_Ch16 R8_Conv_Ch1 R8_Conv_Ch2 R8_Conv_Ch3 R8_Conv_Ch4 R8_Conv_Ch5 R8_Conv_Ch6 R8_Conv_Ch7 R8_Conv_Ch8 R8_Conv_Ch9 R8_Conv_Ch10 R8_Conv_Ch11 R8_Conv_Ch12 R8_Conv_Ch13 R8_Conv_Ch14 R8_Conv_Ch15 R8_Conv_Ch16 R9_Trigger_1 R9_Trigger_2 R9_Trigger_3 R10_Trigger_1 R10_Trigger_2 R10_Trigger_3 R11_Trigger_1 R11_Trigger_2 R11_Trigger_3 R12 R13 Rcal1 Rcal2: library part R
U1_Conv_Ch1 U1_Conv_Ch2 U1_Conv_Ch3 U1_Conv_Ch4 U1_Conv_Ch5 U1_Conv_Ch6 U1_Conv_Ch7 U1_Conv_Ch8 U1_Conv_Ch9 U1_Conv_Ch10 U1_Conv_Ch11 U1_Conv_Ch12 U1_Conv_Ch13 U1_Conv_Ch14 U1_Conv_Ch15 U1_Conv_Ch16: library part AD8005ART
U2_Trigger_1 U2_Trigger_2 U2_Trigger_3: library part AD8055ART, "Low Cost, 300MHz Voltage Feedback Amplifier"
Usup1: library part NCP1117-3.3V

## Via types
v1: diameter 3.5, hole 3, Top Layer to Bottom Layer, 4 vias

## Nets (pads, with @x,y where several pads share a name; then routed paths per layer and width w, separated by ;. In a path a pad name is that pad's centre, name@x,y a point inside that pad or via, vN(x,y) a via of type N, cw(c..) or ccw(c..) an arc to the next point about the centre after c; other vN are vias at no path point)
"+1.25 V": Csup4.+ Csup5.1 R12.2 Usup1.2 Usup1.4
"+5 V": Csup1.1 Csup2.+ Csup3.1 Lref1.2 R5_Conv_Ch1.1 R5_Conv_Ch2.1 R5_Conv_Ch3.1 R5_Conv_Ch4.1 R5_Conv_Ch5.1 R5_Conv_Ch6.1 R5_Conv_Ch7.1 R5_Conv_Ch8.1 R5_Conv_Ch9.1 R5_Conv_Ch10.1 R5_Conv_Ch11.1 R5_Conv_Ch12.1 R5_Conv_Ch13.1 R5_Conv_Ch14.1 R5_Conv_Ch15.1 R5_Conv_Ch16.1 R11_Trigger_1.1 R11_Trigger_2.1 R11_Trigger_3.1 Usup1.3
"+5IN V": Lref1.1 Psup.PAD
"+VREF (600MV)": C3_Conv_Ch1.2 C3_Conv_Ch2.2 C3_Conv_Ch3.2 C3_Conv_Ch4.2 C3_Conv_Ch5.2 C3_Conv_Ch6.2 C3_Conv_Ch7.2 C3_Conv_Ch8.2 C3_Conv_Ch9.2 C3_Conv_Ch10.2 C3_Conv_Ch11.2 C3_Conv_Ch12.2 C3_Conv_Ch13.2 C3_Conv_Ch14.2 C3_Conv_Ch15.2 C3_Conv_Ch16.2 C5_Trigger_1.2 C5_Trigger_2.2 C5_Trigger_3.2 R3_Conv_Ch1.2 R3_Conv_Ch2.2 R3_Conv_Ch3.2 R3_Conv_Ch4.2 R3_Conv_Ch5.2 R3_Conv_Ch6.2 R3_Conv_Ch7.2 R3_Conv_Ch8.2 R3_Conv_Ch9.2 R3_Conv_Ch10.2 R3_Conv_Ch11.2 R3_Conv_Ch12.2 R3_Conv_Ch13.2 R3_Conv_Ch14.2 R3_Conv_Ch15.2 R3_Conv_Ch16.2 R9_Trigger_1.2 R9_Trigger_2.2 R9_Trigger_3.2 R12.1 R13.1
CALIB: Con1.19 Con1.37 Rcal1.1 Rcal2.1
GND: C3_Conv_Ch1.1 C3_Conv_Ch2.1 C3_Conv_Ch3.1 C3_Conv_Ch4.1 C3_Conv_Ch5.1 C3_Conv_Ch6.1 C3_Conv_Ch7.1 C3_Conv_Ch8.1 C3_Conv_Ch9.1 C3_Conv_Ch10.1 C3_Conv_Ch11.1 C3_Conv_Ch12.1 C3_Conv_Ch13.1 C3_Conv_Ch14.1 C3_Conv_Ch15.1 C3_Conv_Ch16.1 C4_Conv_Ch1.1 C4_Conv_Ch2.1 C4_Conv_Ch3.1 C4_Conv_Ch4.1 C4_Conv_Ch5.1 C4_Conv_Ch6.1 C4_Conv_Ch7.1 C4_Conv_Ch8.1 C4_Conv_Ch9.1 C4_Conv_Ch10.1 C4_Conv_Ch11.1 C4_Conv_Ch12.1 C4_Conv_Ch13.1 C4_Conv_Ch14.1 C4_Conv_Ch15.1 C4_Conv_Ch16.1 C5_Trigger_1.1 C5_Trigger_2.1 C5_Trigger_3.1 C6_Trigger_1.1 C6_Trigger_2.1 C6_Trigger_3.1 C7_Trigger_1.- C7_Trigger_2.- C7_Trigger_3.- Con1.8 Con1.9 Con1.10 Con1.11 Con1.27 Con1.28 Con1.29 Con1.38 Con1.39 Csup1.2 Csup2.- Csup3.2 Csup4.- Csup5.2 R13.2 Rcal1.2 Rcal2.2 U1_Conv_Ch1.2 U1_Conv_Ch2.2 U1_Conv_Ch3.2 U1_Conv_Ch4.2 U1_Conv_Ch5.2 U1_Conv_Ch6.2 U1_Conv_Ch7.2 U1_Conv_Ch8.2 U1_Conv_Ch9.2 U1_Conv_Ch10.2 U1_Conv_Ch11.2 U1_Conv_Ch12.2 U1_Conv_Ch13.2 U1_Conv_Ch14.2 U1_Conv_Ch15.2 U1_Conv_Ch16.2 U2_Trigger_1.2 U2_Trigger_2.2 U2_Trigger_3.2 Usup1.1
NetC1_Conv_Ch1_2: C1_Conv_Ch1.2 R1_Conv_Ch1.1
NetC1_Conv_Ch2_2: C1_Conv_Ch2.2 R1_Conv_Ch2.1
NetC1_Conv_Ch3_2: C1_Conv_Ch3.2 R1_Conv_Ch3.1
NetC1_Conv_Ch4_2: C1_Conv_Ch4.2 R1_Conv_Ch4.1
NetC1_Conv_Ch5_2: C1_Conv_Ch5.2 R1_Conv_Ch5.1
NetC1_Conv_Ch6_2: C1_Conv_Ch6.2 R1_Conv_Ch6.1
NetC1_Conv_Ch7_2: C1_Conv_Ch7.2 R1_Conv_Ch7.1
NetC1_Conv_Ch8_2: C1_Conv_Ch8.2 R1_Conv_Ch8.1
NetC1_Conv_Ch9_2: C1_Conv_Ch9.2 R1_Conv_Ch9.1
NetC1_Conv_Ch10_2: C1_Conv_Ch10.2 R1_Conv_Ch10.1
NetC1_Conv_Ch11_2: C1_Conv_Ch11.2 R1_Conv_Ch11.1
NetC1_Conv_Ch12_2: C1_Conv_Ch12.2 R1_Conv_Ch12.1
NetC1_Conv_Ch13_2: C1_Conv_Ch13.2 R1_Conv_Ch13.1
NetC1_Conv_Ch14_2: C1_Conv_Ch14.2 R1_Conv_Ch14.1
NetC1_Conv_Ch15_2: C1_Conv_Ch15.2 R1_Conv_Ch15.1
NetC1_Conv_Ch16_2: C1_Conv_Ch16.2 R1_Conv_Ch16.1
NetC2_Conv_Ch1_2: C2_Conv_Ch1.2 R2_Conv_Ch1.1
NetC2_Conv_Ch2_2: C2_Conv_Ch2.2 R2_Conv_Ch2.1
NetC2_Conv_Ch3_2: C2_Conv_Ch3.2 R2_Conv_Ch3.1
NetC2_Conv_Ch4_2: C2_Conv_Ch4.2 R2_Conv_Ch4.1
NetC2_Conv_Ch5_2: C2_Conv_Ch5.2 R2_Conv_Ch5.1
NetC2_Conv_Ch6_2: C2_Conv_Ch6.2 R2_Conv_Ch6.1
NetC2_Conv_Ch7_2: C2_Conv_Ch7.2 R2_Conv_Ch7.1
NetC2_Conv_Ch8_2: C2_Conv_Ch8.2 R2_Conv_Ch8.1
NetC2_Conv_Ch9_2: C2_Conv_Ch9.2 R2_Conv_Ch9.1
NetC2_Conv_Ch10_2: C2_Conv_Ch10.2 R2_Conv_Ch10.1
NetC2_Conv_Ch11_2: C2_Conv_Ch11.2 R2_Conv_Ch11.1
NetC2_Conv_Ch12_2: C2_Conv_Ch12.2 R2_Conv_Ch12.1
NetC2_Conv_Ch13_2: C2_Conv_Ch13.2 R2_Conv_Ch13.1
NetC2_Conv_Ch14_2: C2_Conv_Ch14.2 R2_Conv_Ch14.1
NetC2_Conv_Ch15_2: C2_Conv_Ch15.2 R2_Conv_Ch15.1
NetC2_Conv_Ch16_2: C2_Conv_Ch16.2 R2_Conv_Ch16.1
NetC4_Conv_Ch1_2: C4_Conv_Ch1.2 R5_Conv_Ch1.2 U1_Conv_Ch1.5
NetC4_Conv_Ch2_2: C4_Conv_Ch2.2 R5_Conv_Ch2.2 U1_Conv_Ch2.5
NetC4_Conv_Ch3_2: C4_Conv_Ch3.2 R5_Conv_Ch3.2 U1_Conv_Ch3.5
NetC4_Conv_Ch4_2: C4_Conv_Ch4.2 R5_Conv_Ch4.2 U1_Conv_Ch4.5
NetC4_Conv_Ch5_2: C4_Conv_Ch5.2 R5_Conv_Ch5.2 U1_Conv_Ch5.5
NetC4_Conv_Ch6_2: C4_Conv_Ch6.2 R5_Conv_Ch6.2 U1_Conv_Ch6.5
NetC4_Conv_Ch7_2: C4_Conv_Ch7.2 R5_Conv_Ch7.2 U1_Conv_Ch7.5
NetC4_Conv_Ch8_2: C4_Conv_Ch8.2 R5_Conv_Ch8.2 U1_Conv_Ch8.5
NetC4_Conv_Ch9_2: C4_Conv_Ch9.2 R5_Conv_Ch9.2 U1_Conv_Ch9.5
NetC4_Conv_Ch10_2: C4_Conv_Ch10.2 R5_Conv_Ch10.2 U1_Conv_Ch10.5
NetC4_Conv_Ch11_2: C4_Conv_Ch11.2 R5_Conv_Ch11.2 U1_Conv_Ch11.5
NetC4_Conv_Ch12_2: C4_Conv_Ch12.2 R5_Conv_Ch12.2 U1_Conv_Ch12.5
NetC4_Conv_Ch13_2: C4_Conv_Ch13.2 R5_Conv_Ch13.2 U1_Conv_Ch13.5
NetC4_Conv_Ch14_2: C4_Conv_Ch14.2 R5_Conv_Ch14.2 U1_Conv_Ch14.5
NetC4_Conv_Ch15_2: C4_Conv_Ch15.2 R5_Conv_Ch15.2 U1_Conv_Ch15.5
NetC4_Conv_Ch16_2: C4_Conv_Ch16.2 R5_Conv_Ch16.2 U1_Conv_Ch16.5
NetC6_Trigger_1_2: C6_Trigger_1.2 C7_Trigger_1.+ R11_Trigger_1.2 U2_Trigger_1.5
NetC6_Trigger_2_2: C6_Trigger_2.2 C7_Trigger_2.+ R11_Trigger_2.2 U2_Trigger_2.5
NetC6_Trigger_3_2: C6_Trigger_3.2 C7_Trigger_3.+ R11_Trigger_3.2 U2_Trigger_3.5
NetR1_Conv_Ch1_2: R1_Conv_Ch1.2 R4_Conv_Ch1.1 U1_Conv_Ch1.3
NetR1_Conv_Ch2_2: R1_Conv_Ch2.2 R4_Conv_Ch2.1 U1_Conv_Ch2.3
NetR1_Conv_Ch3_2: R1_Conv_Ch3.2 R4_Conv_Ch3.1 U1_Conv_Ch3.3
NetR1_Conv_Ch4_2: R1_Conv_Ch4.2 R4_Conv_Ch4.1 U1_Conv_Ch4.3
NetR1_Conv_Ch5_2: R1_Conv_Ch5.2 R4_Conv_Ch5.1 U1_Conv_Ch5.3
NetR1_Conv_Ch6_2: R1_Conv_Ch6.2 R4_Conv_Ch6.1 U1_Conv_Ch6.3
NetR1_Conv_Ch7_2: R1_Conv_Ch7.2 R4_Conv_Ch7.1 U1_Conv_Ch7.3
NetR1_Conv_Ch8_2: R1_Conv_Ch8.2 R4_Conv_Ch8.1 U1_Conv_Ch8.3
NetR1_Conv_Ch9_2: R1_Conv_Ch9.2 R4_Conv_Ch9.1 U1_Conv_Ch9.3
NetR1_Conv_Ch10_2: R1_Conv_Ch10.2 R4_Conv_Ch10.1 U1_Conv_Ch10.3
NetR1_Conv_Ch11_2: R1_Conv_Ch11.2 R4_Conv_Ch11.1 U1_Conv_Ch11.3
NetR1_Conv_Ch12_2: R1_Conv_Ch12.2 R4_Conv_Ch12.1 U1_Conv_Ch12.3
NetR1_Conv_Ch13_2: R1_Conv_Ch13.2 R4_Conv_Ch13.1 U1_Conv_Ch13.3
NetR1_Conv_Ch14_2: R1_Conv_Ch14.2 R4_Conv_Ch14.1 U1_Conv_Ch14.3
NetR1_Conv_Ch15_2: R1_Conv_Ch15.2 R4_Conv_Ch15.1 U1_Conv_Ch15.3
NetR1_Conv_Ch16_2: R1_Conv_Ch16.2 R4_Conv_Ch16.1 U1_Conv_Ch16.3
NetR2_Conv_Ch1_2: R2_Conv_Ch1.2 R3_Conv_Ch1.1 U1_Conv_Ch1.4
NetR2_Conv_Ch2_2: R2_Conv_Ch2.2 R3_Conv_Ch2.1 U1_Conv_Ch2.4
NetR2_Conv_Ch3_2: R2_Conv_Ch3.2 R3_Conv_Ch3.1 U1_Conv_Ch3.4
NetR2_Conv_Ch4_2: R2_Conv_Ch4.2 R3_Conv_Ch4.1 U1_Conv_Ch4.4
NetR2_Conv_Ch5_2: R2_Conv_Ch5.2 R3_Conv_Ch5.1 U1_Conv_Ch5.4
NetR2_Conv_Ch6_2: R2_Conv_Ch6.2 R3_Conv_Ch6.1 U1_Conv_Ch6.4
NetR2_Conv_Ch7_2: R2_Conv_Ch7.2 R3_Conv_Ch7.1 U1_Conv_Ch7.4
NetR2_Conv_Ch8_2: R2_Conv_Ch8.2 R3_Conv_Ch8.1 U1_Conv_Ch8.4
NetR2_Conv_Ch9_2: R2_Conv_Ch9.2 R3_Conv_Ch9.1 U1_Conv_Ch9.4
NetR2_Conv_Ch10_2: R2_Conv_Ch10.2 R3_Conv_Ch10.1 U1_Conv_Ch10.4
NetR2_Conv_Ch11_2: R2_Conv_Ch11.2 R3_Conv_Ch11.1 U1_Conv_Ch11.4
NetR2_Conv_Ch12_2: R2_Conv_Ch12.2 R3_Conv_Ch12.1 U1_Conv_Ch12.4
NetR2_Conv_Ch13_2: R2_Conv_Ch13.2 R3_Conv_Ch13.1 U1_Conv_Ch13.4
NetR2_Conv_Ch14_2: R2_Conv_Ch14.2 R3_Conv_Ch14.1 U1_Conv_Ch14.4
NetR2_Conv_Ch15_2: R2_Conv_Ch15.2 R3_Conv_Ch15.1 U1_Conv_Ch15.4
NetR2_Conv_Ch16_2: R2_Conv_Ch16.2 R3_Conv_Ch16.1 U1_Conv_Ch16.4
NetR4_Conv_Ch1_2: R4_Conv_Ch1.2 R6_Conv_Ch1.1 R7_Conv_Ch1.1 R8_Conv_Ch1.1 U1_Conv_Ch1.1
NetR4_Conv_Ch2_2: R4_Conv_Ch2.2 R6_Conv_Ch2.1 R7_Conv_Ch2.1 R8_Conv_Ch2.1 U1_Conv_Ch2.1
NetR4_Conv_Ch3_2: R4_Conv_Ch3.2 R6_Conv_Ch3.1 R7_Conv_Ch3.1 R8_Conv_Ch3.1 U1_Conv_Ch3.1
NetR4_Conv_Ch4_2: R4_Conv_Ch4.2 R6_Conv_Ch4.1 R7_Conv_Ch4.1 R8_Conv_Ch4.1 U1_Conv_Ch4.1
NetR4_Conv_Ch5_2: R4_Conv_Ch5.2 R6_Conv_Ch5.1 R7_Conv_Ch5.1 R8_Conv_Ch5.1 U1_Conv_Ch5.1
NetR4_Conv_Ch6_2: R4_Conv_Ch6.2 R6_Conv_Ch6.1 R7_Conv_Ch6.1 R8_Conv_Ch6.1 U1_Conv_Ch6.1
NetR4_Conv_Ch7_2: R4_Conv_Ch7.2 R6_Conv_Ch7.1 R7_Conv_Ch7.1 R8_Conv_Ch7.1 U1_Conv_Ch7.1
NetR4_Conv_Ch8_2: R4_Conv_Ch8.2 R6_Conv_Ch8.1 R7_Conv_Ch8.1 R8_Conv_Ch8.1 U1_Conv_Ch8.1
NetR4_Conv_Ch9_2: R4_Conv_Ch9.2 R6_Conv_Ch9.1 R7_Conv_Ch9.1 R8_Conv_Ch9.1 U1_Conv_Ch9.1
NetR4_Conv_Ch10_2: R4_Conv_Ch10.2 R6_Conv_Ch10.1 R7_Conv_Ch10.1 R8_Conv_Ch10.1 U1_Conv_Ch10.1
NetR4_Conv_Ch11_2: R4_Conv_Ch11.2 R6_Conv_Ch11.1 R7_Conv_Ch11.1 R8_Conv_Ch11.1 U1_Conv_Ch11.1
NetR4_Conv_Ch12_2: R4_Conv_Ch12.2 R6_Conv_Ch12.1 R7_Conv_Ch12.1 R8_Conv_Ch12.1 U1_Conv_Ch12.1
NetR4_Conv_Ch13_2: R4_Conv_Ch13.2 R6_Conv_Ch13.1 R7_Conv_Ch13.1 R8_Conv_Ch13.1 U1_Conv_Ch13.1
NetR4_Conv_Ch14_2: R4_Conv_Ch14.2 R6_Conv_Ch14.1 R7_Conv_Ch14.1 R8_Conv_Ch14.1 U1_Conv_Ch14.1
NetR4_Conv_Ch15_2: R4_Conv_Ch15.2 R6_Conv_Ch15.1 R7_Conv_Ch15.1 R8_Conv_Ch15.1 U1_Conv_Ch15.1
NetR4_Conv_Ch16_2: R4_Conv_Ch16.2 R6_Conv_Ch16.1 R7_Conv_Ch16.1 R8_Conv_Ch16.1 U1_Conv_Ch16.1
NetR9_Trigger_1_1: R9_Trigger_1.1 R10_Trigger_1.1 U2_Trigger_1.4
NetR9_Trigger_2_1: R9_Trigger_2.1 R10_Trigger_2.1 U2_Trigger_2.4
NetR9_Trigger_3_1: R9_Trigger_3.1 R10_Trigger_3.1 U2_Trigger_3.4
SUM_CH1: R8_Conv_Ch1.2 R8_Conv_Ch2.2 R8_Conv_Ch8.2 R8_Conv_Ch9.2 U2_Trigger_1.3
SUM_CH3: R8_Conv_Ch3.2 R8_Conv_Ch4.2 R8_Conv_Ch5.2 R8_Conv_Ch10.2 R8_Conv_Ch11.2 R8_Conv_Ch12.2 U2_Trigger_2.3
SUM_CH6: R8_Conv_Ch6.2 R8_Conv_Ch7.2 R8_Conv_Ch13.2 R8_Conv_Ch14.2 U2_Trigger_3.3
SUM_CH15: R8_Conv_Ch15.2
SUM_CH16: R8_Conv_Ch16.2
"TO ADC_CH1": R7_Conv_Ch1.2
"TO ADC_CH2": R7_Conv_Ch2.2
"TO ADC_CH3": R7_Conv_Ch3.2
"TO ADC_CH4": R7_Conv_Ch4.2
"TO ADC_CH5": R7_Conv_Ch5.2
"TO ADC_CH6": R7_Conv_Ch6.2
"TO ADC_CH7": R7_Conv_Ch7.2
"TO ADC_CH8": R7_Conv_Ch8.2
"TO ADC_CH9": R7_Conv_Ch9.2
"TO ADC_CH10": R7_Conv_Ch10.2
"TO ADC_CH11": R7_Conv_Ch11.2
"TO ADC_CH12": R7_Conv_Ch12.2
"TO ADC_CH13": R7_Conv_Ch13.2
"TO ADC_CH14": R7_Conv_Ch14.2
"TO ADC_CH15": R7_Conv_Ch15.2
"TO ADC_CH16": R7_Conv_Ch16.2
"TO SCOPE_CH1": P1.PAD R6_Conv_Ch1.2
"TO SCOPE_CH2": P2.PAD R6_Conv_Ch2.2
"TO SCOPE_CH3": P3.PAD R6_Conv_Ch3.2
"TO SCOPE_CH4": P4.PAD R6_Conv_Ch4.2
"TO SCOPE_CH5": P5.PAD R6_Conv_Ch5.2
"TO SCOPE_CH6": P6.PAD R6_Conv_Ch6.2
"TO SCOPE_CH7": P7.PAD R6_Conv_Ch7.2
"TO SCOPE_CH8": P8.PAD R6_Conv_Ch8.2
"TO SCOPE_CH9": P9.PAD R6_Conv_Ch9.2
"TO SCOPE_CH10": P10.PAD R6_Conv_Ch10.2
"TO SCOPE_CH11": P11.PAD R6_Conv_Ch11.2
"TO SCOPE_CH12": P12.PAD R6_Conv_Ch12.2
"TO SCOPE_CH13": P13.PAD R6_Conv_Ch13.2
"TO SCOPE_CH14": P14.PAD R6_Conv_Ch14.2
"TO SCOPE_CH15": P15.PAD R6_Conv_Ch15.2
"TO SCOPE_CH16": P16.PAD R6_Conv_Ch16.2
TRIG_CH1: R10_Trigger_1.2 U2_Trigger_1.1
TRIG_CH2: R10_Trigger_2.2 U2_Trigger_2.1
TRIG_CH3: R10_Trigger_3.2 U2_Trigger_3.1
UDIFF+_CH1: C1_Conv_Ch1.1 Con1.18
UDIFF+_CH2: C1_Conv_Ch2.1 Con1.17
UDIFF+_CH3: C1_Conv_Ch3.1 Con1.16
UDIFF+_CH4: C1_Conv_Ch4.1 Con1.15
UDIFF+_CH5: C1_Conv_Ch5.1 Con1.14
UDIFF+_CH6: C1_Conv_Ch6.1 Con1.13
UDIFF+_CH7: C1_Conv_Ch7.1 Con1.12
UDIFF+_CH8: C1_Conv_Ch8.1 Con1.26
UDIFF+_CH9: C1_Conv_Ch9.1 Con1.25
UDIFF+_CH10: C1_Conv_Ch10.1 Con1.24
UDIFF+_CH11: C1_Conv_Ch11.1 Con1.23
UDIFF+_CH12: C1_Conv_Ch12.1 Con1.22
UDIFF+_CH13: C1_Conv_Ch13.1 Con1.21
UDIFF+_CH14: C1_Conv_Ch14.1 Con1.20
UDIFF+_CH15: C1_Conv_Ch15.1
UDIFF+_CH16: C1_Conv_Ch16.1
UDIFF-_CH1: C2_Conv_Ch1.1 Con1.36
UDIFF-_CH2: C2_Conv_Ch2.1 Con1.35
UDIFF-_CH3: C2_Conv_Ch3.1 Con1.34
UDIFF-_CH4: C2_Conv_Ch4.1 Con1.33
UDIFF-_CH5: C2_Conv_Ch5.1 Con1.32
UDIFF-_CH6: C2_Conv_Ch6.1 Con1.31
UDIFF-_CH7: C2_Conv_Ch7.1 Con1.30
UDIFF-_CH8: C2_Conv_Ch8.1 Con1.7
UDIFF-_CH9: C2_Conv_Ch9.1 Con1.6
UDIFF-_CH10: C2_Conv_Ch10.1 Con1.5
UDIFF-_CH11: C2_Conv_Ch11.1 Con1.4
UDIFF-_CH12: C2_Conv_Ch12.1 Con1.3
UDIFF-_CH13: C2_Conv_Ch13.1 Con1.2
UDIFF-_CH14: C2_Conv_Ch14.1 Con1.1
UDIFF-_CH15: C2_Conv_Ch15.1
UDIFF-_CH16: C2_Conv_Ch16.1
pads on no net: Calib.SHIELD Calib.WIRE Trig_ch1.SHIELD Trig_ch1.WIRE Trig_ch2.SHIELD Trig_ch2.WIRE Trig_ch3.SHIELD Trig_ch3.WIRE
copper on no net: | length 461
  Top Layer w0.254: 12,12 12,92 121,92 121,12 12,12 ; 62.1,35.3 62.1,69.8 69.1,69.8 69.1,35.3 62.1,35.3
  other v1: 65.5,15.5 105,15.5 65.3,88.2 104.8,88.2

## Dimensions
12,12 to 121,12 on Top Layer